# Altium PCB Flexi_encoder_BOB.pcbdoc (part 3 of 3)
Units mil, origin at the board's own origin, x right, y up, seen from the top; angles counter-clockwise.
Board outline 1230.32 x 1046.59 mil, 2 copper layers (Top Layer, Bottom Layer), stack 57.918 mil thick; 19 components, 15 nets, 2516 pads, 15 vias.
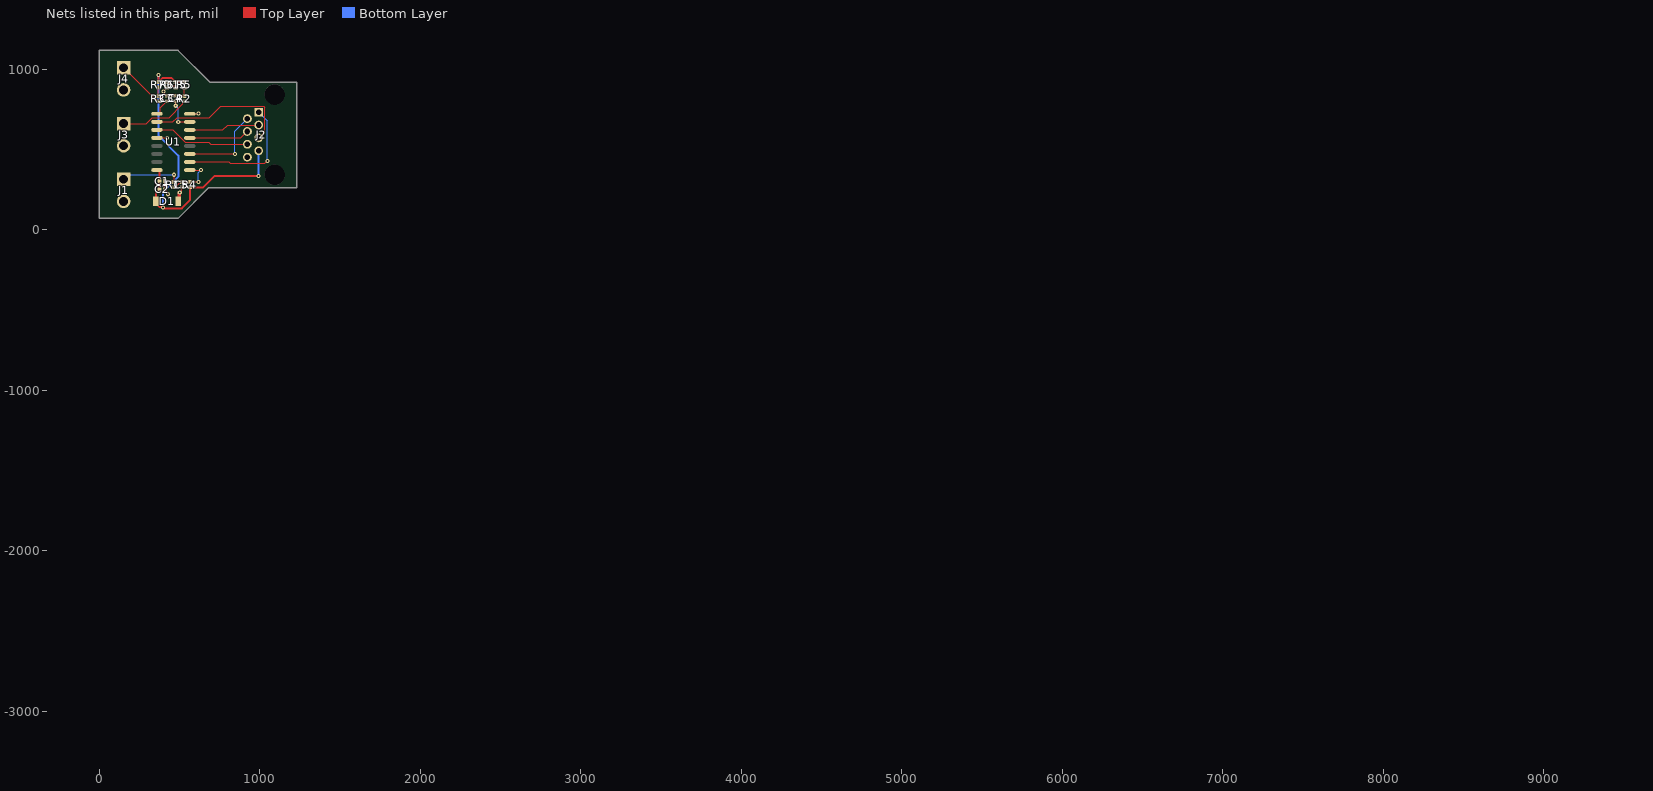
[diagram p3: the nets of this part, all layers, seen from the top]

## Via types
v1: diameter 25.59, hole 11.81, Top Layer to Bottom Layer, 15 vias

## Nets (pads, with @x,y where several pads share a name; then routed paths per layer and width w, separated by ;. In a path a pad name is that pad's centre, name@x,y a point inside that pad or via, vN(x,y) a via of type N, cw(c..) or ccw(c..) an arc to the next point about the centre after c; other vN are vias at no path point)
+5V: C1.1 C2.1 D1.2 D15.A J2.7 R4.2 R5.2 R7.2 U1.16 | length 2315.7
  Top Layer w12: U1.16@360.24,371.89 370.62,371.89 375.98,366.52 375.98,250.63 354.33,228.98 354.33,164.96 378.9,140.4 396.02,140.4 v1(398.62,137.8) 402.3,137.8 406.84,133.25 515.64,133.25 565.94,183.56 R4.2@565.94,264.02 648.83,264.02 720.65,335.83 v1(994.09,335.83) ; v1(369.09,964.57) R7.2@369.09,919.92 370.08,919.92 396.06,945.9 450.4,945.9 476.38,919.92 R5.2@531.5,919.92
  Bottom Layer w12: v1(369.09,964.57) 369.09,587.16 494.5,461.75 494.5,331.03 398.62,235.15 v1(398.62,137.8) ; v1(994.09,335.83) J2.7@994.09,492.13
ENC_A: C5.1 R1.1 R4.1 U1.1 | length 325.9
  Top Layer w6: R1.1@461.42,264.02 482.28,264.02 491.27,273 491.27,279.69 500.25,288.67 506.94,288.67 C5.1@515.75,297.48 v1(618.54,297.48) ; U1.1@564.96,371.89 v1(634.84,371.89)
  Bottom Layer w6: v1(618.54,297.48) 618.54,355.59 v1(634.84,371.89)
ENC_A_EXT+: J2.1 U1.2 | length 819
  Top Layer w6: U1.2@564.96,421.89 808.58,421.89 816.7,413.77 1031.78,413.77 1046.16,428.15 v1(1048.23,428.15)
  Bottom Layer w6: J2.1@994.09,732.13 1048.23,677.99 v1(1048.23,428.15)
ENC_A_EXT-: J2.2 U1.3 | length 533.9
  Top Layer w6: U1.3@564.96,471.89 v1(846.46,471.89)
  Bottom Layer w6: v1(846.46,471.89) 846.46,614.49 J2.2@924.09,692.13
ENC_B: C4.1 R2.1 R5.1 U1.7 | length 332
  Top Layer w6: v1(477.36,772.64) C4.1@477.36,800.83 486.17,809.64 492.86,809.64 501.45,818.23 501.45,824.91 510.04,833.5 R2.1@531.5,833.5 R5.1@531.5,886.46 ; v1(492.86,671.89) U1.7@564.96,671.89
  Bottom Layer w6: v1(477.36,772.64) 492.86,757.14 v1(492.86,671.89)
ENC_B_EXT+: J2.3 U1.6 | length 441.7
  Top Layer w6: U1.6@564.96,621.89 769.86,621.89 800.1,652.13 J2.3@994.09,652.13
ENC_B_EXT-: J2.4 U1.5 | length 375.8
  Top Layer w6: U1.5@564.96,571.89 883.86,571.89 J2.4@924.09,612.13
ENC_Z: C3.1 R3.1 R7.1 U1.9 | length 236.5
  Top Layer w6: U1.9@360.24,721.89 372.72,721.89 380.86,730.03 380.86,759.44 C3.1@422.24,800.83 ; R7.1@369.09,886.46 R3.1@369.09,833.5 377.91,824.69 384.59,824.69 393.18,816.1 393.18,809.42 401.77,800.83 C3.1@423.23,800.83
ENC_Z_EXT+: J2.5 U1.10 | length 923.5
  Top Layer w6: U1.10@360.24,671.89 459.22,671.89 486.42,699.09 686.91,699.09 758.3,770.48 1026.01,770.48 1032.45,764.04 1032.45,610.48 J2.5@994.09,572.13
ENC_Z_EXT-: J2.6 U1.11 | length 601
  Top Layer w6: U1.11@360.24,621.89 459.09,621.89 536.29,544.69 683.77,544.69 696.34,532.13 J2.6@924.09,532.13
GND: C1.2 C2.2 C3.2 C4.2 C5.2 D1.1 J1.2 J2.8 J3.2 J4.2 R6.1 U1.8 U1.12 | length 431
  Top Layer w6: U1.12@360.24,571.89 v1(422.24,571.89) ; C1.2@409.45,303.39 C2.2@409.45,251.61 409.45,250.63 426.29,233.79 426.29,224.8 v1(430.04,221.05) ; R6.1@423.23,886.63 422.24,886.63 405.63,870.02 405.63,863.73 v1(401.88,859.98) 405.63,856.23 405.63,850.9 422.24,834.29 C4.2@477.36,834.29 ; v1(502.37,231.3) 515.75,244.67 C5.2@515.75,264.02 ; U1.8@564.96,721.89 565.73,722.66 619.31,722.66 v1(620.08,723.43)
  Top Layer w20: D1.1@492.13,176.77 499.84,184.49 499.84,227.25 502.37,229.79 v1(502.37,231.3)
NetD15_K: D15.K R6.2 | length 68.1
  Top Layer w10: R6.2@423.23,920.1 430.04,913.29 439.55,913.29 459.57,893.27 470.55,893.27 D15.K@477.36,886.46
NetJ1_1: J1.1 R1.2 | length 373.8
  Top Layer w6: R1.2@461.42,297.48 467.72,303.78 v1(467.72,342.13)
  Bottom Layer w6: J1.1@152.56,314.57 180.12,342.13 v1(467.72,342.13)
NetJ3_1: J3.1 R2.2 | length 441.1
  Top Layer w6: J3.1@152.56,661.02 293.5,661.02 331.56,699.09 437.45,699.09 521.7,783.34 521.7,791.23 530.51,800.04 R2.2@531.5,800.04
NetJ4_1: J4.1 R3.2 | length 303
  Top Layer w6: J4.1@152.56,1008.86 352.57,808.85 360.28,808.85 R3.2@369.09,800.04
pads on no net: J2. U1.4 U1.13 U1.14 U1.15

## Polygon pours and split planes (outlines as drawn)
GND on Bottom Layer "GND_L02_P001" (solid, remove dead copper, pour order 1): 0,0 0,118.11 0,1102.36 0,1220.47 1230.32,1220.47 1230.32,0 118.11,0
GND on Top Layer "GND_L01_P000" (solid, remove dead copper, pour order 0): 0,0 0,118.11 0,1102.36 0,1220.47 1230.32,1220.47 1230.32,0 118.11,0

## Other copper
Top Layer:
  text "TOP LAYER" at 1254.47,4436.83 h120
Bottom Layer:
  text "BOTTOM LAYER" at 1172.47,4433.83 h120

## Silkscreen, mask and mechanical layers (free items; w line width, h text height)
Top Overlay:
  text "TOP SILKSCREEN" at 1094.44,4441.85 h45
Bottom Overlay:
  drawing of 680 lines, arcs and shapes, not listed
  text "BOTTOM SILKSCREEN" at 1111.47,4442.83 h45
  text "PCB Revision '.VarRevNo'" at 236.22,639.76 h60 r270
  text "Flexi Encoder BOB" at 290.35,639.76 h60 r270
  text "Designed in Canada" at 29.09,324.8 h50 r270
  text "Licensed under CERN-OHL-S v2" at 458.02,285.99 h50 r270
Top Paste:
  text "TOP PASTE" at 1174.44,4422.23 h120
Bottom Paste:
  text "BOTTOM PASTE" at 1174.44,4426.47 h120
Top Solder:
  text "TOP SOLDERMASK" at 1094.44,4440.7 h120
Bottom Solder:
  text "BOTTOM SOLDERMASK" at 1099.93,4436.47 h120
Mechanical 6:
  the board outline again, w5
  text "BOARD OUTLINE" at 1109.14,4329.5 h120
Mechanical 7:
  drawing of 1329 lines, arcs and shapes, not listed
  text "1" at -586.9,6729.98 h120
  text "2" at 2238.76,6729.98 h120
  text "3" at 5063.76,6729.98 h120
  text "4" at 7904.77,6729.98 h120
  text "5" at 10738.76,6729.98 h120
  text "6" at 13573.76,6729.98 h120
  text "A" at -1913.24,5486.98 h120
  text "A" at 14894.19,5429.06 h120
  text "B" at -1913.24,2753 h120
  text "B" at 14898.32,2724.56 h120
  text "C" at -1913.24,-28.02 h120
  text "ENGINEER:" at 10361.76,-2835.02 h120
  text "TITLE:" at 11861.76,-2835.02 h120
  text "D" at -1913.24,-2850.02 h120
  text "D" at 14886.76,-2850.02 h120
  text "Andrew Marles" at 10430.76,-2967.02 h120
  text "Expatria" at 8693.08,-3023.96 h100
  text "PCB DESIGNER:" at 10361.76,-3130.02 h120
  text ".Title" at 12003.23,-3133.02 h200
  text "Technologies" at 8909.62,-3181.44 h60
  text "Copyright Expatria Technologies 2022. This document" at 4150,-3223.51 h120
  text "Andrew Marles" at 10419.19,-3250.44 h120
  text "describes Open Hardware and is licensed under the" at 4150,-3323.51 h120
  text "CERN-OHL-S v2. No warranty is implied or expressed." at 4150,-3423.51 h120
  text "DATE:" at 10361.76,-3435.02 h120
  text "PART NO.:" at 11861.76,-3435.02 h120
  text "REV:" at 13961.76,-3435.02 h120
  text ".PRINT_DATE" at 10411.76,-3555.02 h120
  text "'.VarRevNo'" at 14238.98,-3555.5 h120
  text "'.PCBPARTNO'_'.PCBREVNO'" at 12313.98,-3557.5 h120
  text "Expatria Technologies Inc." at 8381.85,-3573.21 h120
  text "1136 Glade Court" at 8389.19,-3698.94 h120
  text "FILE NAME:" at 10361.76,-3735.02 h120
  text "DWG NO:" at 11861.76,-3735.02 h120
  text "SCALE:" at 13961.76,-3735.02 h120
  text "Port Coquitlam, BC, Canada V3B 1R5" at 8379.19,-3823.94 h120
  text ".Print_Scale" at 14052.76,-3847.02 h120
  text ".PCB_FILE_NAME_NO_PATH" at 10411.76,-3855.02 h120
  text "1" at -586.9,-4070.02 h120
  text "2" at 2238.76,-4070.02 h120
  text "3" at 5063.76,-4070.02 h120
  text "4" at 7904.77,-4070.02 h120
  text "5" at 10738.76,-4070.02 h120
  text "6" at 13573.76,-4070.02 h120
Top Component Center:
  text "ASSEMBLY TOP" at 1102.58,4440.12 h120
Drill Drawing:
  drawing of 296 lines, arcs and shapes, not listed
  text "NOTES: UNLESS OTHERWISE SPECIFIED, ALL DIMENSIONS ARE IN INCHES." at 9448.57,6383.14 h100
  text "1. MATERIAL: EPOXY GLASS FR-4 UL94V-0 HIGHEST IN STOCK AVAILABLE Tg." at 9448.57,6133.14 h100
  text "Layer" at 4673.44,6116.71 h60
  text "Name" at 5083.35,6116.71 h60
  text "Material" at 6013.1,6116.71 h60
  text "Thickness" at 6872.87,6116.71 h60
  text "Constant" at 7522.7,6116.71 h60
  text "Board Layer Stack" at 8092.56,6116.71 h60
  text "FABRICATE PCB IN ACCORDANCE WITH IPC-6012, CLASS2; PER IPC-6011." at 9598.57,6033.14 h100
  text "Top Overlay" at 5083.35,5996.71 h60
  text "Top Solder" at 5083.35,5876.71 h60
  text "Solder Resist" at 6013.1,5876.71 h60
  text "0.40mil" at 6872.87,5876.71 h60
  text "3.5" at 7522.7,5876.71 h60
  text "2. HOLE LOCATION TOLERANCE +/- .003 DIAMETER OF TRUE POSITION." at 9448.57,5833.14 h100
  text "1" at 4673.44,5756.71 h60
  text "Top Layer" at 5083.35,5756.71 h60
  text "1.40mil" at 6872.87,5756.71 h60
  text "ARTWORK REGISTRATION FRONT TO BACK +/- .003" at 9598.57,5733.14 h100
  text "Dielectric 3" at 5083.35,5636.71 h60
  text "PP-006" at 6013.1,5636.71 h60
  text "7.87mil" at 6872.87,5636.71 h60
  text "4.5" at 7522.7,5636.71 h60
  text "3. ALL PLATED THROUGH HOLES TO HAVE A MINIMUM PLATING OF .0007 COPPER." at 9448.57,5583.14 h100
  text "Dielectric1" at 5083.35,5516.71 h60
  text "FR-4" at 6013.1,5516.71 h60
  text "39.37mil" at 6872.87,5516.71 h60
  text "4.8" at 7522.7,5516.71 h60
  text "ANNULAR RING TO BE .001 MIN.  VIA HOLES MAY HAVE A .001 ANNULAR RING." at 9598.57,5483.14 h100
  text "Dielectric 4" at 5083.35,5396.71 h60
  text "PP-006" at 6013.1,5396.71 h60
  text "7.87mil" at 6872.87,5396.71 h60
  text "4.5" at 7522.7,5396.71 h60
  text "TEARDROPS MAY BE ADDED TO AVOID DRILL BREAKOUT." at 9598.57,5383.14 h100
  text "2" at 4673.44,5276.71 h60
  text "Bottom Layer" at 5083.35,5276.71 h60
  text "1.40mil" at 6872.87,5276.71 h60
  text "Bottom Solder" at 5083.35,5156.71 h60
  text "Solder Resist" at 6013.1,5156.71 h60
  text "0.40mil" at 6872.87,5156.71 h60
  text "3.5" at 7522.7,5156.71 h60
  text "4. LPI (LIQUID PHOTO IMAGABLE) SOLDERMASK PER IPC-SM-840, TYPE B, CLASS H" at 9457.16,5121.48 h100
  text "Bottom Overlay" at 5083.35,5036.71 h60
  text "BOTH SIDES, COLOR: ORANGE WITH MAXIMUM MISREGISTRATION" at 9607.16,5021.48 h100
  text "TO BE .003 OVER BARE COPPER.  ALL EXPOSED COPPER AREAS, BOTH SIDES" at 9607.16,4921.48 h100
  text "Total board thickness:" at 4673.44,4916.71 h60
  text "58.72mil" at 6872.87,4916.71 h60
  text "TO BE PLATED 2-6 MICROINCHES ELECTROLESS GOLD OVER 120 MICROINCHES" at 9607.16,4821.48 h100
  text "ELECTROLESS NICKEL.  MANUFACTURER MAY MODIFY SOLDERMASK TO REMOVE" at 9607.16,4721.48 h100
  text "ANY SLIVERS THAT ARE .004 OR LESS BETWEEN FINE PITCHED LANDS." at 9607.16,4621.48 h100
  text "5. SILKSCREEN BOTH SIDES USING WHITE EPOXY INK.  MANUFACTURER MUST MODIFY" at 9467.16,4451.48 h100
  text "DRILL DRAWING" at 1091.68,4433.88 h120
  text "SLIKSCREEN IMAGE TO REMOVE ANY WHITE EPOXY INK FROM EXPOSED METAL." at 9617.16,4351.48 h100
  text "6. IF REQUIRED, MAXIMUM RADIUS ON ALL INSIDE CORNERS TO BE .025" at 9451.71,4203.68 h100
  text "7. MANUFACTURER TO MARK BOARD WITH COPPER OR WHITE EPOXY INK, IN AN" at 9451.71,4082.62 h100
  text "OPEN AREA ON BOTTOM SIDE, DESIGNATED WITH A DATE CODE INDICATING" at 9617.16,3980.42 h100
  text "YEAR AND WEEK OF FABRICATION, 4 DIGIT FORMAT" at 9601.71,3882.62 h100
  text "8. FINISHED BOARD TO COMPLY WITH PHYSICAL AND ENVIRONMENTAL REQUIREMENTS" at 9451.71,3732.62 h100
  text "OF IPC-A-600. BOW AND TWIST PER 10-3, CLASS 2, MULTI AND UL796" at 9601.71,3632.62 h100
  text "9. REFERENCE ONLY: APPROXIMATE MINIMUM LINE IS .004 AND SPACE IS .004" at 9413.16,3469.42 h100
  text "10. UNLESS OTHERWISE SPECIFIED, BOARD SHALL BE .062 NOMINAL THICKNESS" at 9413.16,3319.42 h100
  text "Symbol" at 8206.54,-1426.42 h72
  text "Count" at 8712.41,-1426.42 h72
  text "Hole Size" at 9242.28,-1426.42 h72
  text "Plated" at 10391.94,-1426.42 h72
  text "Hole Type" at 10897.82,-1426.42 h72
  text "Drill Layer Pair" at 11631.62,-1426.42 h72
  text "Pad Shape" at 13131.17,-1426.42 h72
  text "15" at 8712.41,-1576.42 h60
  text "11.81mil (0.300mm)" at 9242.28,-1576.42 h60
  text "PTH" at 10391.94,-1576.42 h60
  text "Round" at 10897.82,-1576.42 h60
  text "Top Layer - Bottom Layer" at 11631.62,-1576.42 h60
  text "Rounded" at 13131.17,-1576.42 h60
  text "8" at 8712.41,-1726.42 h60
  text "35.04mil (0.890mm)" at 9242.28,-1726.42 h60
  text "PTH" at 10391.94,-1726.42 h60
  text "Round" at 10897.82,-1726.42 h60
  text "Top Layer - Bottom Layer" at 11631.62,-1726.42 h60
  text "(Mixed)" at 13131.17,-1726.42 h60
  text "6" at 8712.41,-1876.42 h60
  text "55.12mil (1.400mm)" at 9242.28,-1876.42 h60
  text "PTH" at 10391.94,-1876.42 h60
  text "Round" at 10897.82,-1876.42 h60
  text "Top Layer - Bottom Layer" at 11631.62,-1876.42 h60
  text "(Mixed)" at 13131.17,-1876.42 h60
  text "2" at 8712.41,-2026.42 h60
  text "127.95mil (3.250mm)" at 9242.28,-2026.42 h60
  text "NPTH" at 10391.94,-2026.42 h60
  text "Round" at 10897.82,-2026.42 h60
  text "Top Layer - Bottom Layer" at 11631.62,-2026.42 h60
  text "Rounded" at 13131.17,-2026.42 h60
  text "31 Total" at 8712.41,-2176.42 h60
Mechanical 19:
  text "MFG Board Points" at 1313.17,4365.17 h60